# Altium PCB 线圈1.PcbDoc
Units mm, origin at the board's own origin, x right, y up, seen from the top; angles counter-clockwise.
Board outline 152.4 x 101.6 mm, 2 copper layers (Top Layer, Bottom Layer); 1 components, 0 nets, 0 pads, 0 vias.
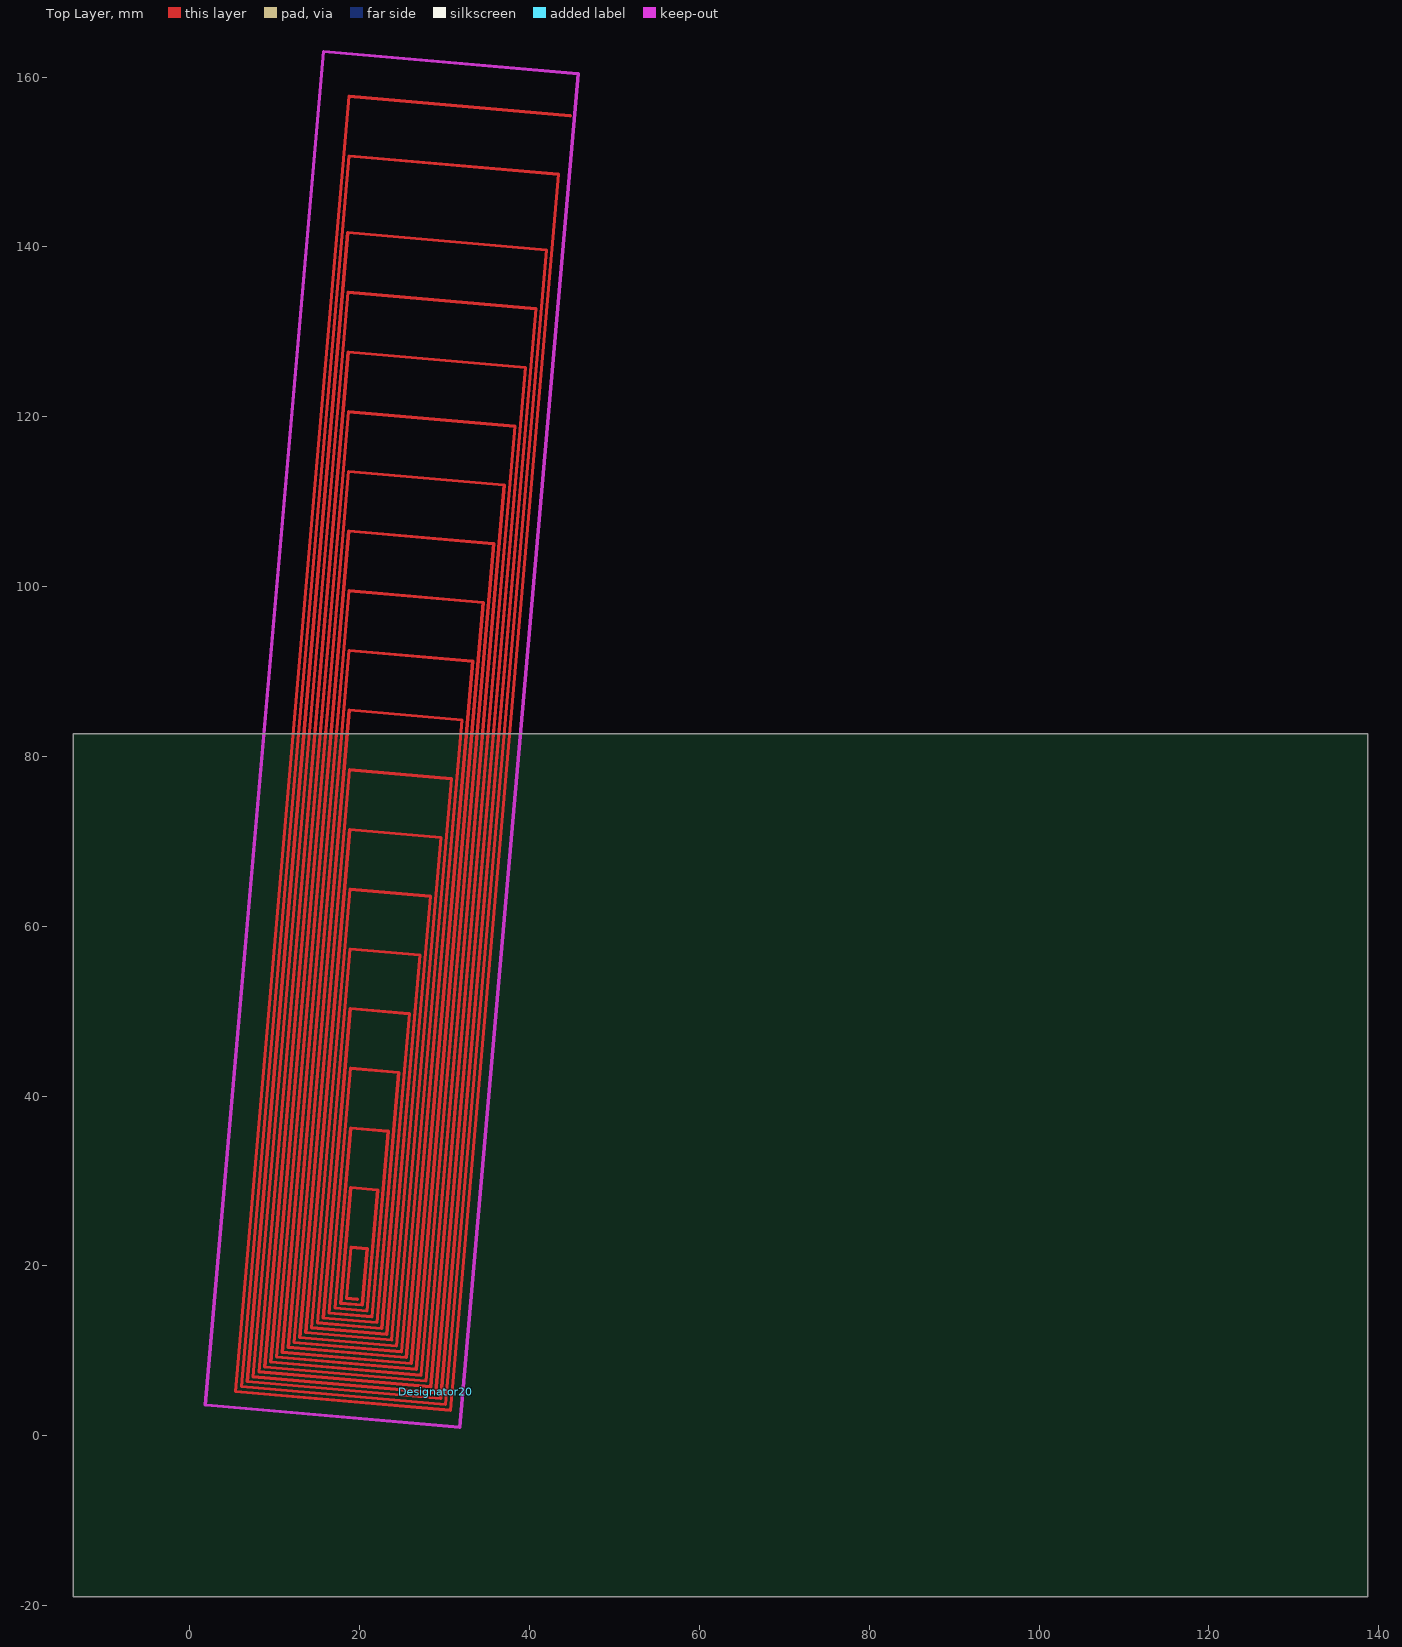
[diagram p0: Top Layer view]
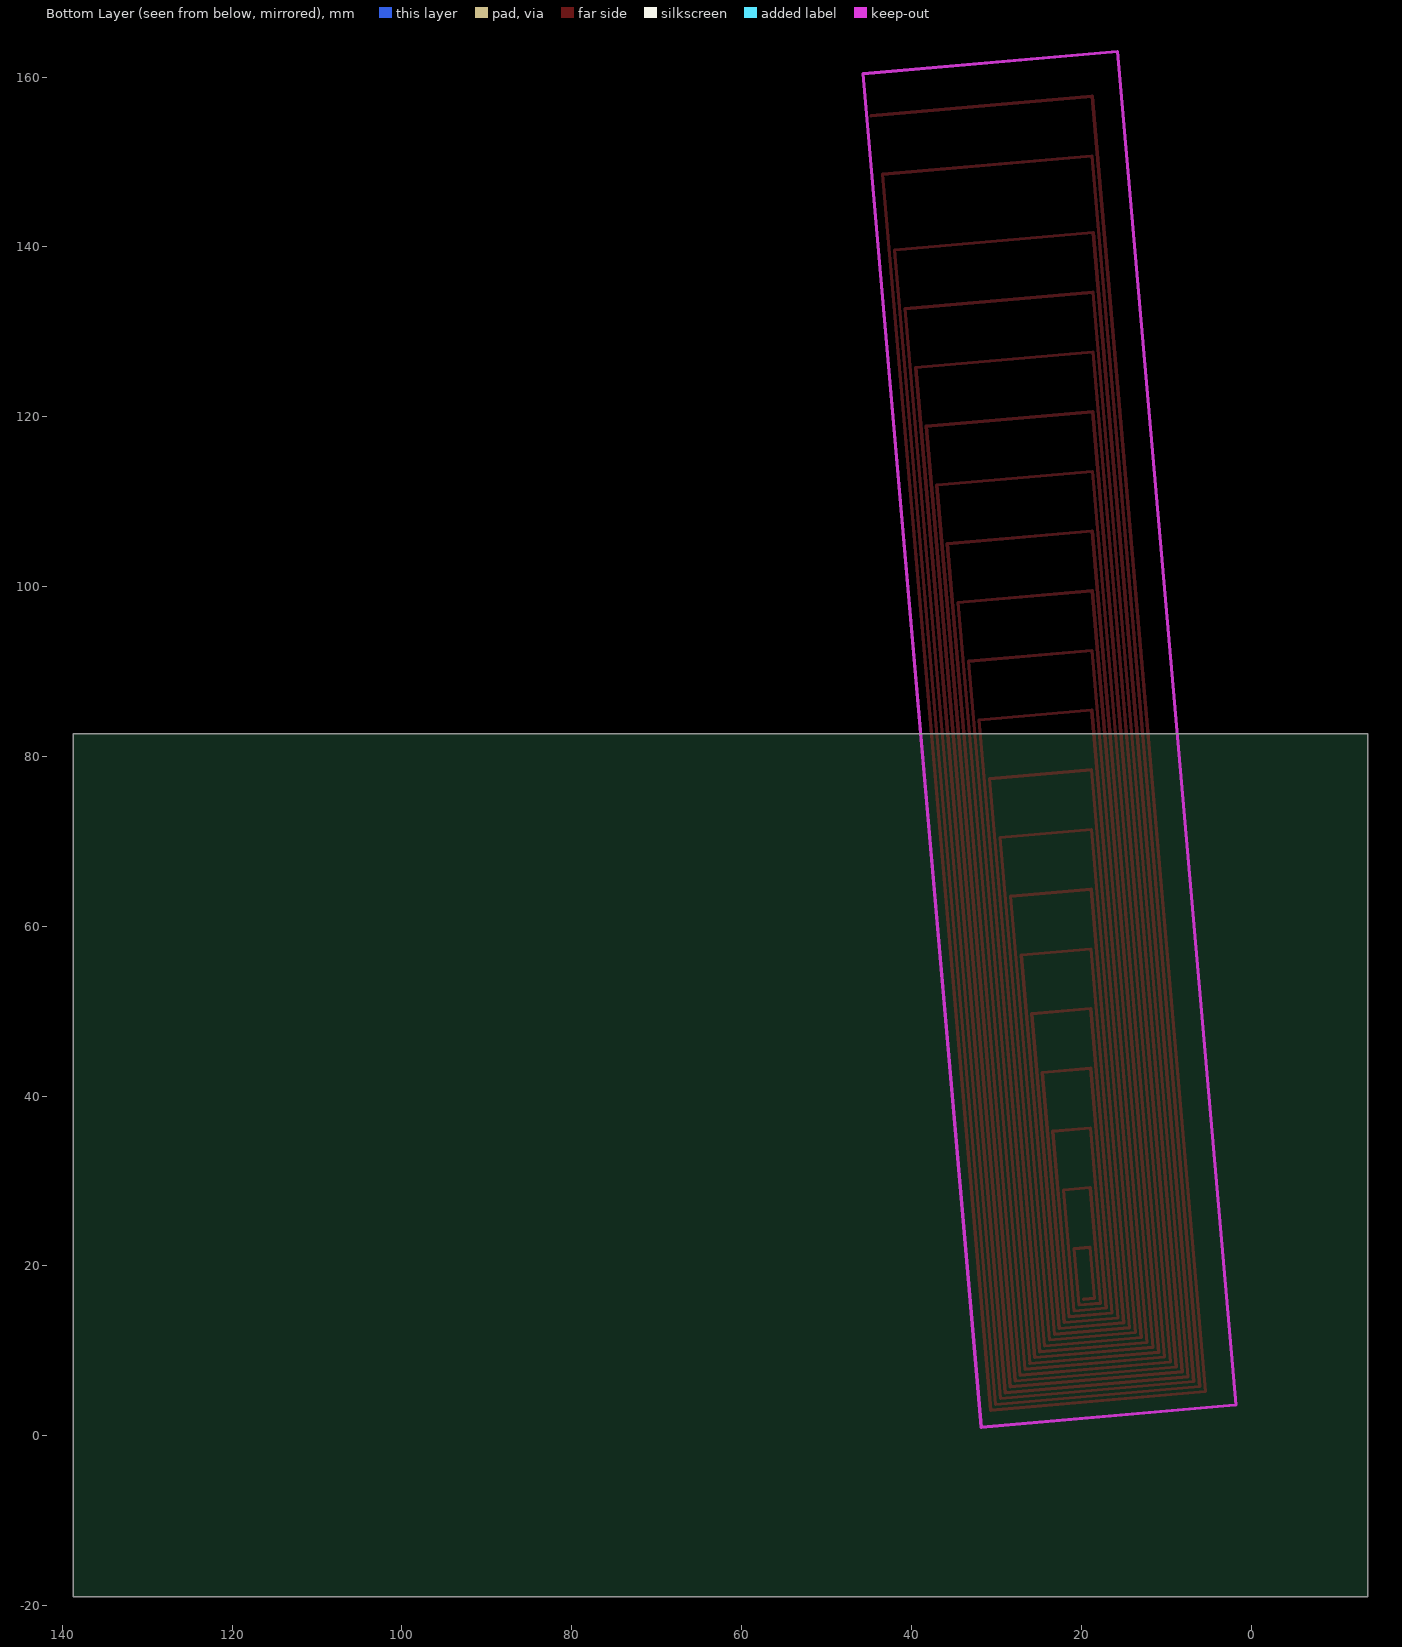
[diagram p1: Bottom Layer view, seen from below]

## Layer stack, top to bottom
Top Layer: signal copper 0.0356
Dielectric: dielectric 0.32, FR-4, Dk 4.8
Bottom Layer: signal copper 0.0356

## Board outline
-13.716,-18.923 138.684,-18.923 138.684,82.677 -13.716,82.677

## Design rules (kind name [scope] priority, off if disabled: settings)
Clearance [All] p1: gap=0.152
PolygonConnect [All] p1: connectstyle=Relief reliefconductorwidth=0.254 reliefentries=4 polygonreliefangle="90 Angle" airgapwidth=0.254
RoutingVias [All] p1: holewidth=0.711 width=1.27 viastyle="Through Hole" minholewidth=0.711 minwidth=1.27 maxholewidth=0.711 maxwidth=1.27
SolderMaskExpansion [All] p1: expansion=0.102
Width [All] p1: maxlimit=0.254 minlimit=0.254 preferedwidth=0.254
28 further rules are at their usual default settings.

## Components (designator, comment, footprint, x,y, rotation, side; value= is the part's Value field where it differs from the comment)
Designator20 "Comment" "Stretched Rectangular Coil" 28.956,5.207 r85 top

## Footprints (in the part's own frame and the unit in brackets; to place one, negate y for a bottom-side part, rotate by r counter-clockwise, add the part's x,y. Pads: shape width x height; smd on the part's side, far side on the other; paste and mask are expansions set on the pad)
"Stretched Rectangular Coil" [mm]
  Top Layer lines w0.381: 10.033,10.16 10.033,11.43 16.063,11.43 16.063,9.525 9.398,9.525 9.398,12.065 23.063,12.065 23.063,8.89 8.763,8.89 8.763,12.7 30.063,12.7 30.063,8.255 8.128,8.255 8.128,13.335 37.063,13.335 37.063,7.62 7.493,7.62 7.493,13.97 44.063,13.97 44.063,6.985 6.858,6.985 6.858,14.605 51.054,14.605 51.054,6.35 6.223,6.35 6.223,15.24 58.063,15.24 58.063,5.715 5.588,5.715 5.588,15.875 65.063,15.875 65.063,5.08 4.953,5.08 4.953,16.51 72.063,16.51 72.063,4.445 4.318,4.445 4.318,17.145 79.063,17.145 79.063,3.81 3.683,3.81 3.683,17.78 86.063,17.78 86.063,3.175 3.048,3.175 3.048,18.415 93.063,18.415 93.063,2.54 2.413,2.54 2.413,19.05 100.063,19.05 100.063,1.905 1.778,1.905 1.778,19.685 107.061,19.685 107.061,1.27 1.143,1.27 1.143,20.32 114.063,20.32 114.063,0.635 0.508,0.635 0.508,20.955 121.063,20.955 121.063,0 -0.127,0 -0.127,21.59 128.063,21.59 128.063,-0.635 -0.762,-0.635 -0.762,22.225 135.063,22.225 135.063,-1.27 -1.397,-1.27 -1.397,22.86 144.063,22.86 144.063,-1.905 -2.032,-1.905 -2.032,23.495 151.063,23.495 151.063,-2.667
  Keep-Out Layer lines w0.381: -3.937,26.924 156.063,26.924 156.063,-3.175 -3.937,-3.175 -3.937,26.825

## Nets (pads, with @x,y where several pads share a name; then routed paths per layer and width w, separated by ;. In a path a pad name is that pad's centre, name@x,y a point inside that pad or via, vN(x,y) a via of type N, cw(c..) or ccw(c..) an arc to the next point about the centre after c; other vN are vias at no path point)